# EAGLE board CT_schematic (EAGLE 7.6.0)

Size 100 x 80 mm. Coordinates in mm from the lower left corner, seen from the top.
Outline: 0,0 100,0 100,80 0,80 0,0
Copper layers (1*16): Top 0.035mm / dielectric 1.5mm / Bottom 0.035mm
Design rules "default": minimum track width 10mil, minimum drill 24mil, track to track 8mil, track to pad 8mil, pad to pad 8mil, via to via 8mil, smd to smd 8mil, copper to edge 40mil, drill to drill 8mil, minimum pad ring 10mil, minimum via ring 8mil, stop-mask expansion 4mil, vias tented up to drill 0mil, thermal gap 10mil

## Footprints (pad centres in the part's own frame; a part is rotated, then mirrored left to right if it is on the bottom)
C0603 = smd 0.8 x 0.8: 1 -0.762,0; 2 0.762,0
C0402 = smd 0.5 x 0.5: 1 -0.508,0; 2 0.508,0
C1210 = smd 1.2 x 2.5: 1 -1.524,0; 2 1.524,0
C0805 = smd 1.2 x 1.3: 1 -1.016,0; 2 1.016,0
EXV-9H = smd 3.505 x 1.676: 1 -2.857,0; 2 2.857,0
L0603 = smd 0.8 x 0.8: 1 -0.762,0; 2 0.762,0
PJ-037B_PACKAGE = drill 3.7 square: 1 12,0 | drill 3.2 square: 2 6,0
R0603 = smd 0.8 x 0.8: 1 -0.762,0; 2 0.762,0
LQFP100 = smd 0.3 x 1.2: 1 -6,-7.75; 2 -5.5,-7.75; 3 -5,-7.75; 4 -4.5,-7.75; 5 -4,-7.75; 6 -3.5,-7.75; 7 -3,-7.75; 8 -2.5,-7.75; 9 -2,-7.75; 10 -1.5,-7.75; 11 -1,-7.75; 12 -0.5,-7.75; 13 0,-7.75; 14 0.5,-7.75; 15 1,-7.75; 16 1.5,-7.75; 17 2,-7.75; 18 2.5,-7.75; 19 3,-7.75; 20 3.5,-7.75; 21 4,-7.75; 22 4.5,-7.75; 23 5,-7.75; 24 5.5,-7.75; 25 6,-7.75; 51 6,7.75; 52 5.5,7.75; 53 5,7.75; 54 4.5,7.75; 55 4,7.75; 56 3.5,7.75; 57 3,7.75; 58 2.5,7.75; 59 2,7.75; 60 1.5,7.75; 61 1,7.75; 62 0.5,7.75; 63 0,7.75; 64 -0.5,7.75; 65 -1,7.75; 66 -1.5,7.75; 67 -2,7.75; 68 -2.5,7.75; 69 -3,7.75; 70 -3.5,7.75; 71 -4,7.75; 72 -4.5,7.75; 73 -5,7.75; 74 -5.5,7.75; 75 -6,7.75 | smd 1.2 x 0.3: 26 7.75,-6; 27 7.75,-5.5; 28 7.75,-5; 29 7.75,-4.5; 30 7.75,-4; 31 7.75,-3.5; 32 7.75,-3; 33 7.75,-2.5; 34 7.75,-2; 35 7.75,-1.5; 36 7.75,-1; 37 7.75,-0.5; 38 7.75,0; 39 7.75,0.5; 40 7.75,1; 41 7.75,1.5; 42 7.75,2; 43 7.75,2.5; 44 7.75,3; 45 7.75,3.5; 46 7.75,4; 47 7.75,4.5; 48 7.75,5; 49 7.75,5.5; 50 7.75,6; 76 -7.75,6; 77 -7.75,5.5; 78 -7.75,5; 79 -7.75,4.5; 80 -7.75,4; 81 -7.75,3.5; 82 -7.75,3; 83 -7.75,2.5; 84 -7.75,2; 85 -7.75,1.5; 86 -7.75,1; 87 -7.75,0.5; 88 -7.75,0; 89 -7.75,-0.5; 90 -7.75,-1; 91 -7.75,-1.5; 92 -7.75,-2; 93 -7.75,-2.5; 94 -7.75,-3; 95 -7.75,-3.5; 96 -7.75,-4; 97 -7.75,-4.5; 98 -7.75,-5; 99 -7.75,-5.5; 100 -7.75,-6
LGA-16 = smd 1.5 x 0.4: 1 -2.1,0.975; 2 -2.1,0.325; 3 -2.1,-0.325; 4 -2.1,-0.975; 9 2.1,-0.975; 10 2.1,-0.325; 11 2.1,0.325; 12 2.1,0.975 | smd 0.4 x 1.5: 5 -0.975,-2.1; 6 -0.325,-2.1; 7 0.325,-2.1; 8 0.975,-2.1; 13 0.975,2.1; 14 0.325,2.1; 15 -0.325,2.1; 16 -0.975,2.1
FCI_10118193-0001LF = smd 0.4 x 1.35: 1 -1.3,2.675; 2 -0.65,2.675; 3 0,2.675; 4 0.65,2.675; 5 1.3,2.675 | smd 1.6 x 1.4: 6 -3.2,2.45; 7 3.2,2.45 | smd 1.9 x 1.9: 8 -1.2,0; 9 1.2,0 | hole 0.5: -3.3,0; 3.3,0
SOT143B = smd 1 x 0.7: 1 -0.75,-1 | smd 0.6 x 0.7: 2 0.95,-1; 3 0.95,1; 4 -0.95,1
QFN-28 = smd 0.813 x 0.305: 1 -2.451,1.5; 2 -2.451,1; 3 -2.451,0.5; 4 -2.451,0; 5 -2.451,-0.5; 6 -2.451,-1; 7 -2.451,-1.5; 15 2.451,-1.5; 16 2.451,-1; 17 2.451,-0.5; 18 2.451,0; 19 2.451,0.5; 20 2.451,1; 21 2.451,1.5 | smd 0.305 x 0.813: 8 -1.5,-2.451; 9 -1,-2.451; 10 -0.5,-2.451; 11 0,-2.451; 12 0.5,-2.451; 13 1,-2.451; 14 1.5,-2.451; 22 1.5,2.451; 23 1,2.451; 24 0.5,2.451; 25 0,2.451; 26 -0.5,2.451; 27 -1,2.451; 28 -1.5,2.451 | smd 3.607 x 3.607: 29 0,0
SJ-43515TS-SMT-TR = smd 2.2 x 3: 1 0.6,-7.4; 4 3.4,-7.4 | smd 3 x 3: 2 12.8,-7.4; 5 17,-3 | smd 2 x 3: 3 5.3,0; 6 2.5,0 | drill 1.8: P$7 4.5,-3.69; P$8 11.54,-3.69
ABLS-25.000MHZ-B2F-T = smd 5.6 x 2.8: 1 -3.81,0; 2 5.69,0
ASEK = smd 1.4 x 1: 1 -1.1,-0.8; 2 1.1,-0.8; 3 1.1,0.8; 4 -1.1,0.8
ASFL1 = smd 1.7 x 1.5: 1 -1.27,-1.1; 2 1.27,-1.1; 3 1.27,1.1; 4 -1.27,1.1
WSON-8 = smd 0.3 x 0.6: 1 -0.75,0; 2 0.05,0; 3 0.85,0; 4 1.65,0; 5 1.65,3.8; 6 0.85,3.8; 7 0.05,3.8; 8 -0.75,3.8 | smd 3 x 2.6: PAD 0.45,1.9
SON-6 = smd 0.55 x 0.3: 1 -0.355,0.5 | smd 0.52 x 0.3: 2 -0.37,0; 3 -0.37,-0.5; 4 0.37,-0.5; 5 0.37,0; 6 0.37,0.5
SW_4-1437565-2 = smd 1.4 x 2.1: 1 -2.23,4.55; 2 -2.23,-4.55; 3 2.23,4.55; 4 2.23,-4.55
LGM67K-G1J2-24-Z = smd 0.8 x 1.4: A -2,0; C 0,0
NC7SZ125M5X = smd 1.3 x 0.7: 1 -1.3,0.95; 2 -1.3,0; 3 -1.3,-0.95; 4 1.3,-0.95; 5 1.3,0.95
DUMMY_PACKAGE_163 = drill 0.3: 1 0,-1; 2 1.5,-1; 3 3,-1

## Placement (x,y rotation side)
C1  1e-06  [C0603]  -41.91,64.77 0 top  (outside the outline)
C2  1e-07  [C0603]  -45.72,64.77 0 top  (outside the outline)
C3  1e-07  [C0603]  -49.53,64.77 0 top  (outside the outline)
C4  1e-07  [C0603]  -53.34,64.77 0 top  (outside the outline)
C5  1e-07  [C0603]  -57.15,64.77 0 top  (outside the outline)
C6  1e-07  [C0603]  -60.96,64.77 0 top  (outside the outline)
C7  1e-07  [C0603]  -64.77,64.77 0 top  (outside the outline)
C8  4.7e-06  [C0603]  -34.29,64.77 0 top  (outside the outline)
C9  1e-07  [C0603]  -68.58,64.77 0 top  (outside the outline)
C10  1e-08  [C0603]  -72.39,64.77 0 top  (outside the outline)
C11  1e-06  [C0603]  -15.24,69.85 0 top  (outside the outline)
C12  1e-11  [C0402]  -45.72,69.85 0 top  (outside the outline)
C13  1e-11  [C0402]  -49.53,69.85 0 top  (outside the outline)
C14  1e-08  [C0402]  -53.34,69.85 0 top  (outside the outline)
C15  1e-08  [C0402]  -57.15,69.85 0 top  (outside the outline)
C16  1e-08  [C0402]  -60.96,69.85 0 top  (outside the outline)
C17  4.7e-07  [C0603]  -38.1,64.77 0 top  (outside the outline)
C18  2.2e-05  [C1210]  -44.45,53.34 0 top  (outside the outline)
C19  2.2e-05  [C1210]  -50.8,53.34 0 top  (outside the outline)
C20  1e-09  [C0402]  -64.77,69.85 0 top  (outside the outline)
C21  1e-09  [C0402]  -68.58,69.85 0 top  (outside the outline)
C22  1e-07  [C0402]  -72.39,69.85 0 top  (outside the outline)
C23  1e-07  [C0402]  -15.24,74.93 0 top  (outside the outline)
C24  1e-07  [C0402]  -19.05,74.93 0 top  (outside the outline)
C25  1e-07  [C0402]  -22.86,74.93 0 top  (outside the outline)
C26  1e-07  [C0402]  -26.67,74.93 0 top  (outside the outline)
C27  1e-05  [C0805]  -15.24,59.69 0 top  (outside the outline)
C28  1e-05  [C0805]  -20.32,59.69 0 top  (outside the outline)
C29  1e-05  [C0805]  -25.4,59.69 0 top  (outside the outline)
C30  1e-05  [C0805]  -30.48,59.69 0 top  (outside the outline)
C31  1e-05  [C0805]  -35.56,59.69 0 top  (outside the outline)
C32  1e-08  [C0402]  -30.48,74.93 0 top  (outside the outline)
C33  1e-08  [C0402]  -34.29,74.93 0 top  (outside the outline)
C34  1e-08  [C0402]  -38.1,74.93 0 top  (outside the outline)
C35  1e-05  [C1210]  -57.15,53.34 0 top  (outside the outline)
C36  1e-05  [C1210]  -63.5,53.34 0 top  (outside the outline)
C37  1e-07  [C0402]  -41.91,74.93 0 top  (outside the outline)
C38  0.0001  [EXV-9H]  -38.1,45.72 0 top  (outside the outline)
C39  0.0001  [EXV-9H]  -49.53,45.72 0 top  (outside the outline)
C40  1e-08  [C0402]  -45.72,74.93 0 top  (outside the outline)
F1  240.0  [L0603]  -19.05,69.85 0 top  (outside the outline)
J1  PJ-037B  [PJ-037B_PACKAGE]  -55.88,24.13 0 top  (outside the outline)
R2  1000.0  [R0603]  -22.86,69.85 0 top  (outside the outline)
R4  4700.0  [R0603]  -26.67,69.85 0 top  (outside the outline)
R5  10000.0  [R0603]  -55.88,59.69 0 top  (outside the outline)
R6  10000.0  [R0603]  -60.96,59.69 0 top  (outside the outline)
R7  10000.0  [R0603]  -66.04,59.69 0 top  (outside the outline)
R8  47000.0  [R0603]  -71.12,59.69 0 top  (outside the outline)
R9  47000.0  [R0603]  -15.24,64.77 0 top  (outside the outline)
R10  47000.0  [R0603]  -20.32,64.77 0 top  (outside the outline)
R11  680.0  [R0603]  -30.48,69.85 0 top  (outside the outline)
R12  100000.0  [R0603]  -40.64,59.69 0 top  (outside the outline)
R13  2231.0  [R0603]  -34.29,69.85 0 top  (outside the outline)
R14  1000.0  [R0603]  -38.1,69.85 0 top  (outside the outline)
R15  10000.0  [R0603]  -25.4,64.77 0 top  (outside the outline)
R16  10000.0  [R0603]  -30.48,64.77 0 top  (outside the outline)
R17  9100.0  [R0603]  -41.91,69.85 0 top  (outside the outline)
R18  680000.0  [R0603]  -45.72,59.69 0 top  (outside the outline)
R19  120000.0  [R0603]  -50.8,59.69 0 top  (outside the outline)
U1  STM32F373VBT7  [LQFP100]  -24.13,8.89 0 top  (outside the outline)
U2  l3g4200d  [LGA-16]  -16.51,53.34 0 top  (outside the outline)
U3  10118193-0001LF  [FCI_10118193-0001LF]  -59.69,35.56 0 top  (outside the outline)
U4  prtr5v0u2ax  [SOT143B]  -58.42,74.93 0 top  (outside the outline)
U5  WM8731CLSEFL  [QFN-28]  -36.83,53.34 0 top  (outside the outline)
U6  SJ-43515TS-SMT-TR  [SJ-43515TS-SMT-TR]  -59.69,10.16 0 top  (outside the outline)
U7  SJ-43515TS-SMT-TR  [SJ-43515TS-SMT-TR]  -39.37,26.67 0 top  (outside the outline)
U8  ABLS-25.000MHZ-B2F-T  [ABLS-25.000MHZ-B2F-T]  -68.58,45.72 0 top  (outside the outline)
U9  ASEK-32.768KHz-ECST  [ASEK]  -29.21,45.72 0 top  (outside the outline)
U10  ASFL1-12.288MHZ-EC-T  [ASFL1]  -50.8,36.83 0 top  (outside the outline)
U11  LP3878SDX-ADJ/NOPB  [WSON-8]  -30.48,34.29 0 top  (outside the outline)
U12  TPS3895ADRYR  [SON-6]  -67.31,73.66 0 top  (outside the outline)
U13  4-1437565-2  [SW_4-1437565-2]  -72.39,24.13 0 top  (outside the outline)
U14  Q65110A2395  [LGM67K-G1J2-24-Z]  -24.13,53.34 0 top  (outside the outline)
U15  nc7sz125m5x  [NC7SZ125M5X]  -68.58,52.07 0 top  (outside the outline)
U16  Dummy  [DUMMY_PACKAGE_163]  -64.77,74.93 0 top  (outside the outline)

## Library data of the parts
C1-C40 F1 J1 R2 R4-R19 U1-U16 = circuit_tree

## Nets
CLK_CRYSTAL_U1_12: C12.1 U1.12 U8.1
CLK_CRYSTAL_U1_13: C13.1 U1.13 U8.2
CLK_U1_8: U1.8 U9.3
CLK_U5_1: U5.1 U10.3
GND: C1.2 C2.2 C3.2 C4.2 C5.2 C6.2 C7.2 C8.2 C9.2 C10.2 C11.2 C12.2 C13.2 C14.2 C15.2 C16.2 C21.2 C22.2 C23.2 C24.2 C25.2 C26.2 C27.2 C28.2 C29.2 C30.2 C31.2 C32.2 C33.2 C34.2 C35.2 C36.2 C37.2 C38.2 C39.2 C40.2 J1.2 R2.2 R5.2 R6.1 R6.2 R8.2 R9.2 R10.2 R14.2 R17.2 R19.2 U1.20 U1.74 U1.99 U2.8 U2.9 U2.10 U2.11 U2.12 U2.13 U3.5 U3.6 U3.7 U3.8 U3.9 U4.1 U5.4 U5.15 U5.19 U5.25 U5.26 U5.29 U6.1 U7.1 U9.2 U10.2 U11.3 U11.PAD U12.2 U14.C U15.1 U15.3 U16.1
NET_U1_14: R4.1 U1.14 U15.4
NET_U1_21: C10.1 C11.1 F1.1 U1.21 U1.22 U1.50 U1.51
NET_U1_49: C9.1 U1.48 U1.49
NET_U1_50: U1.50
NET_U1_52: U1.52
NET_U1_94: R5.1 U1.94
NET_U1_97: U14.A
NET_U1_98: U13.3 U13.4
NET_U2_14: C16.1 C17.1 U2.14
NET_U2_ATNET_1: C17.2
NET_U4_4: U3.1 U4.4
NET_U5_9: U5.9
NET_U5_20: C26.1 C31.1 U5.20
NET_U6_2: C19.1 R9.1 U6.2
NET_U6_5: C18.1 R8.1 U6.5
NET_U6_13: C18.2
NET_U6_14: C19.2
NET_U7_5: C20.1 C21.1 R10.1 R11.1 U7.5
NET_U7_21: R11.2
NET_U7_22: C20.2
NET_U11_1: C34.1 U11.1
NET_U11_6: R13.2 R14.1 U11.6
NET_U11_8: R12.1 U11.8
NET_U12_1: R16.1 R17.1 U12.1
NET_U12_3: R18.2 R19.1 U12.3
NET_U12_4: R15.1 U12.4 U15.2
NET_U13_1: R2.1 U13.1 U13.2
PROC_I2S1_CK: U1.64 U5.7
PROC_I2S1_SD: U1.35 U5.8
PROC_I2S1_WS: U1.63 U5.9 U5.11
PROC_PE2: U1.1 U16.2
PROC_PE3: U1.2 U16.3
PROC_SPI1_MISO: U1.31 U2.4
PROC_SPI1_MOSI: U1.32 U2.3
PROC_SPI1_NSS: R7.1 U1.29 U2.5
PROC_SPI1_SCK: U1.30 U2.2
PROC_USB_DM: U1.70 U3.2 U4.3
PROC_USB_DP: U1.71 U3.3 U4.2
VCC_S1_14V9: C35.1 C38.1 C39.1 J1.1 R12.2 U11.4
VCC_TIER1_3V3: C1.1 C2.1 C3.1 C4.1 C5.1 C6.1 C7.1 C8.1 C14.1 C15.1 C22.1 C23.1 C24.1 C25.1 C27.1 C28.1 C29.1 C30.1 C32.1 C33.1 C36.1 C37.1 C40.1 F1.2 R4.2 R7.2 R13.1 R15.2 R16.2 R18.1 U1.6 U1.28 U1.75 U1.100 U2.1 U2.15 U2.16 U5.3 U5.5 U5.12 U5.18 U9.4 U10.4 U11.5 U12.6 U15.5

## Tracks (layer width: path | path; a pad name or v marks a point on that pad's centre or on a via)
CLK_CRYSTAL_U1_12  (2 unrouted)
CLK_CRYSTAL_U1_13  (2 unrouted)
CLK_U1_8  (1 unrouted)
CLK_U5_1  (1 unrouted)
GND  (78 unrouted)
NET_U1_14  (2 unrouted)
NET_U1_21  (6 unrouted)
NET_U1_49  (2 unrouted)
NET_U1_94  (1 unrouted)
NET_U1_98  (1 unrouted)
NET_U2_14  (2 unrouted)
NET_U4_4  (1 unrouted)
NET_U5_20  (2 unrouted)
NET_U6_2  (2 unrouted)
NET_U6_5  (2 unrouted)
NET_U7_5  (4 unrouted)
NET_U11_1  (1 unrouted)
NET_U11_6  (2 unrouted)
NET_U11_8  (1 unrouted)
NET_U12_1  (2 unrouted)
NET_U12_3  (2 unrouted)
NET_U12_4  (2 unrouted)
NET_U13_1  (2 unrouted)
PROC_I2S1_CK  (1 unrouted)
PROC_I2S1_SD  (1 unrouted)
PROC_I2S1_WS  (2 unrouted)
PROC_PE2  (1 unrouted)
PROC_PE3  (1 unrouted)
PROC_SPI1_MISO  (1 unrouted)
PROC_SPI1_MOSI  (1 unrouted)
PROC_SPI1_NSS  (2 unrouted)
PROC_SPI1_SCK  (1 unrouted)
PROC_USB_DM  (2 unrouted)
PROC_USB_DP  (2 unrouted)
VCC_S1_14V9  (5 unrouted)
VCC_TIER1_3V3  (45 unrouted)